# Altium PCB PCB1.PcbDoc
Units mil, origin at the board's own origin, x right, y up, seen from the top; angles counter-clockwise.
Board outline 5500 x 4000 mil, 2 copper layers (Top Layer, Bottom Layer); 61 components, 63 nets, 287 pads, 71 vias.
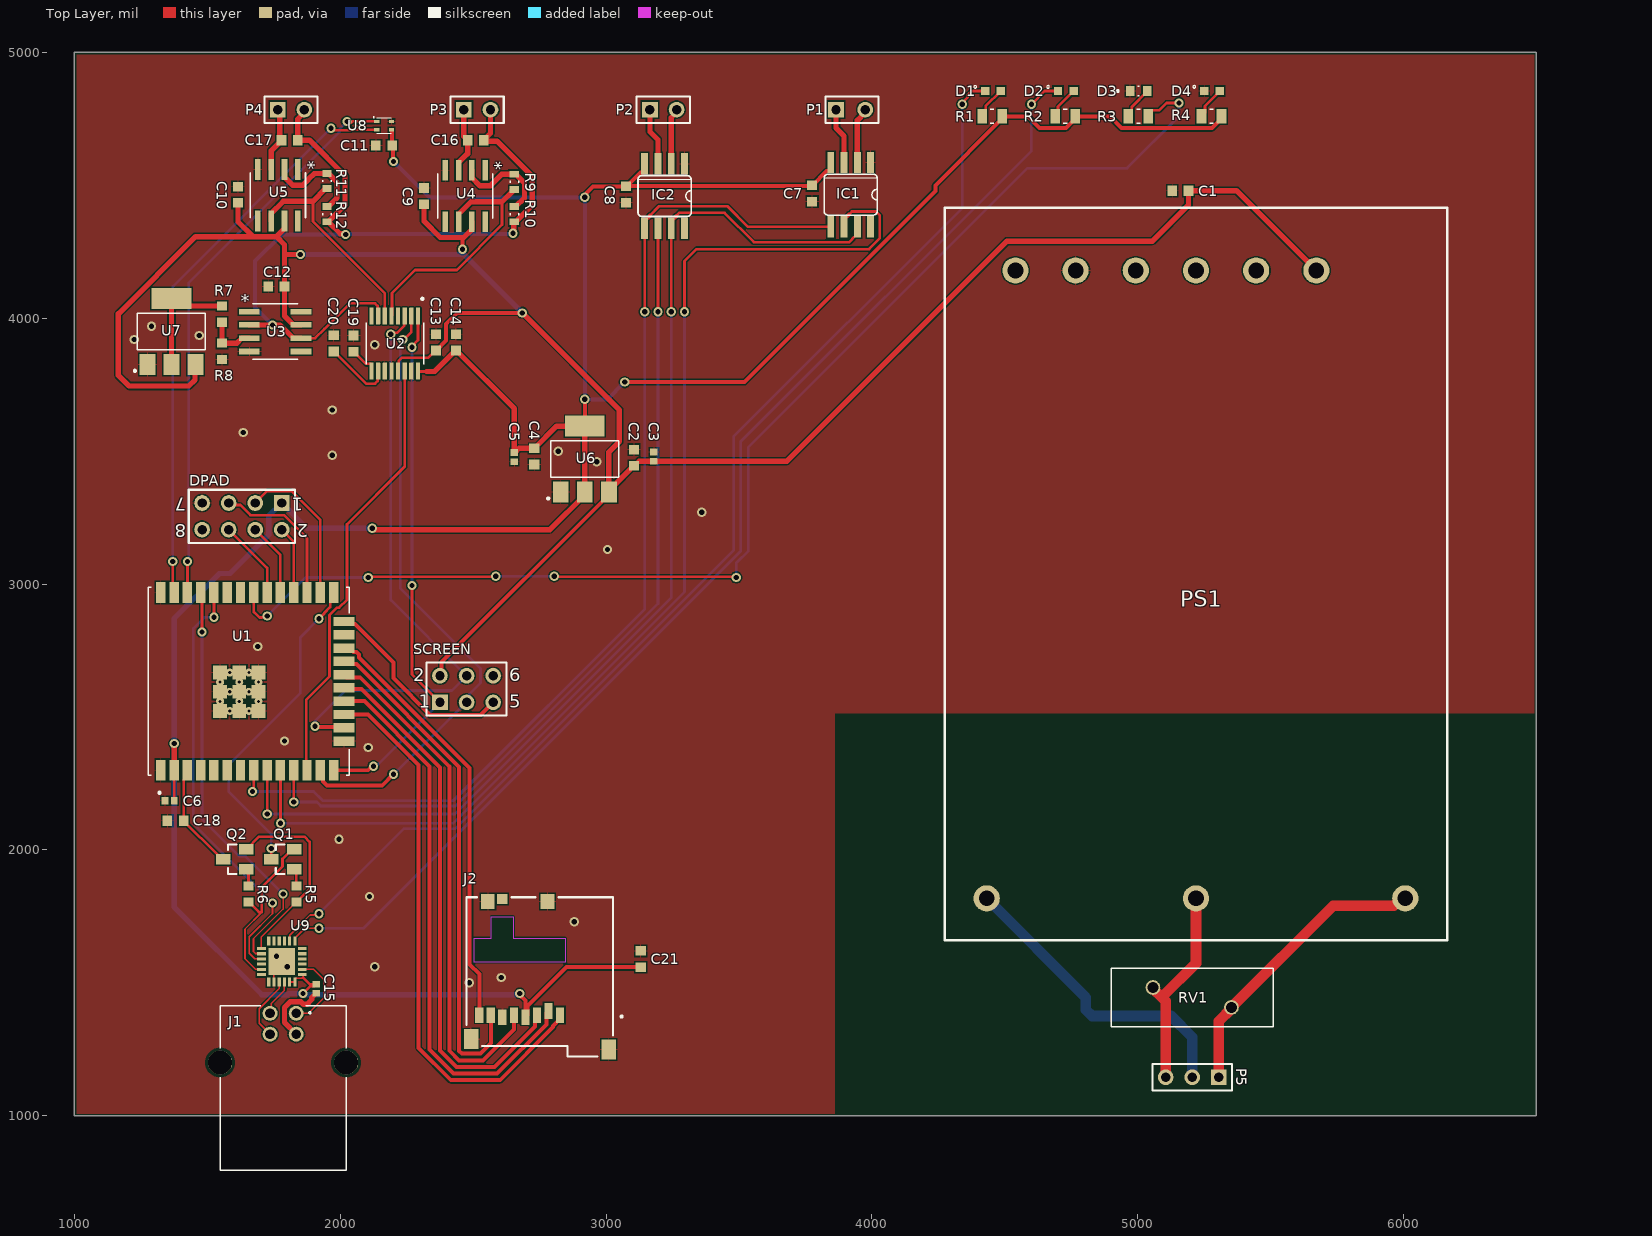
[diagram p0: Top Layer view]
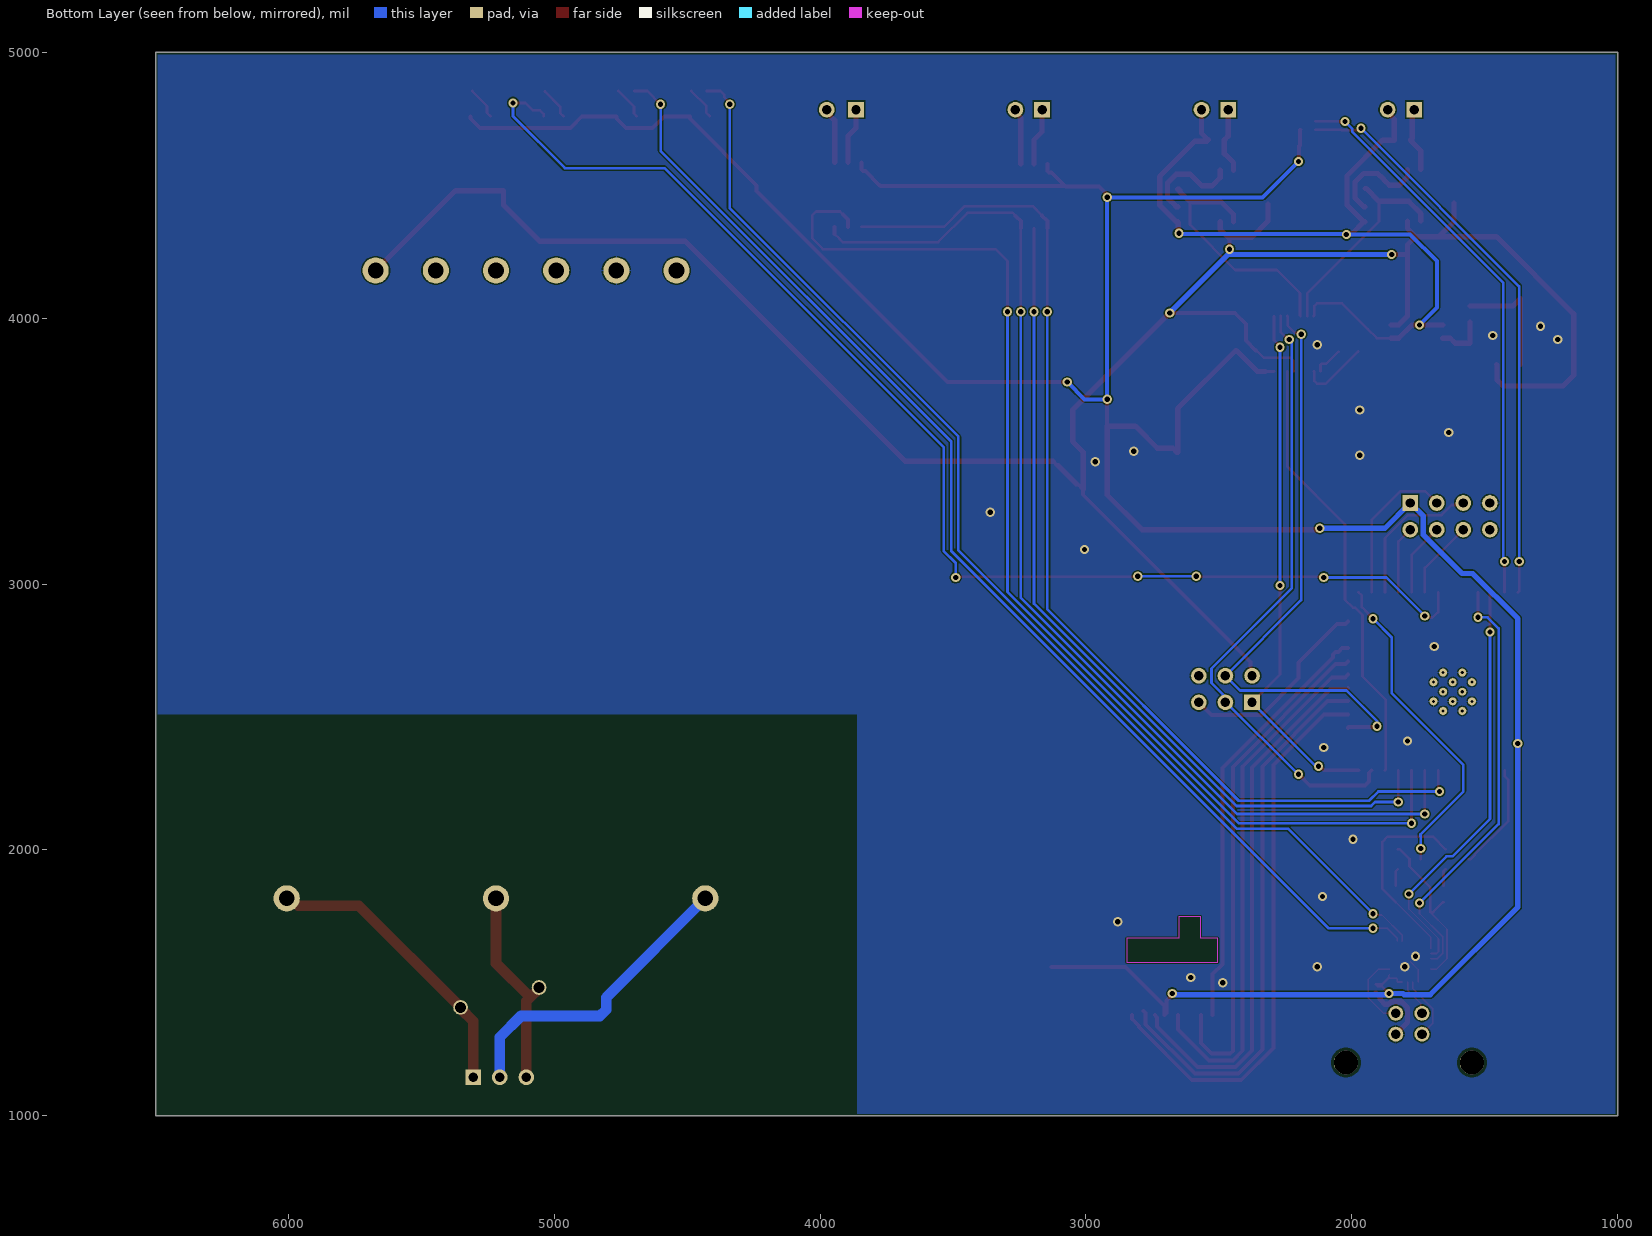
[diagram p1: Bottom Layer view, seen from below]

## Layer stack, top to bottom
Top Solder: solder mask 0.4, Solder Resist, Dk 3.5
Top Layer: signal copper 1.4
Dielectric 1: dielectric 12.6, FR-4, Dk 4.8
Bottom Layer: signal copper 1.4
Bottom Solder: solder mask 0.4, Solder Resist, Dk 3.5

## Board outline
1000,1000 6500,1000 6500,5000 1000,5000

## Design rules (kind name [scope] priority, off if disabled: settings)
BoardOutlineClearance [All] p1: gap=7.87 ignorepadtopadclearanceinfootprint=FALSE
Clearance [All] p1: gap=5 ignorepadtopadclearanceinfootprint=FALSE except(9.84: Arc-Hole Track-Hole SMDPad-Hole THPad-Hole Via-Hole Fill-Hole Poly-Hole Region-Hole Text-Hole)
ComponentClearance [All] p1: gap=5 collisioncheckmode=3 verticalgap=5 showdistances=TRUE
DiffPairsRouting [All] p1: maxlimit=10 minlimit=5 mostfreqgap=5 toplayer_minwidth=5 toplayer_maxwidth=1000 toplayer_prefwidth=5 bottomlayer_minwidth=5 bottomlayer_maxwidth=1000 bottomlayer_prefwidth=5 maxuncoupledlength=500
Height [All] p1: minheight=0 maxheight=71497.94 prefheight=500
HoleSize [All] p1: absolutevalues=TRUE maxlimit=248.03 minlimit=11.81 maxpercent=80.000 minpercent=20.000
HoleToHoleClearance [All] p1: gap=9.84 allowstackedmicrovias=FALSE
MinimumAnnularRing [All] p1: minimumring=3
MinimumSolderMaskSliver [All] p1: minsoldermaskwidth=0
PlaneClearance [All] p1: clearance=5
PlaneConnect PlaneConnectPowerPads [InPadClass('PowerPads')] p1: planeconnectstyle=Direct reliefexpansion=20 reliefentries=4 reliefconductorwidth=10 reliefairgap=10
PlaneConnect [All] p2: pad.planeconnectstyle=Relief pad.reliefexpansion=11.81 pad.reliefentries=4 pad.reliefconductorwidth=5 pad.reliefairgap=5 via.planeconnectstyle=Direct via.reliefexpansion=11.81 via.reliefentries=4 via.reliefconductorwidth=5 via.reliefairgap=5
PolygonConnect PolygonConnectPowerPads [All vs (InPadClass('PowerPads'))] p1: connectstyle=Direct reliefconductorwidth=10 reliefentries=4 polygonreliefangle="90 Angle" airgapwidth=10
PolygonConnect [All] p2: thpad.connectstyle=Relief thpad.reliefconductorwidth=5 thpad.reliefentries=4 thpad.polygonreliefangle="90 Angle" thpad.airgapwidth=5 smdpad.connectstyle=Relief smdpad.reliefconductorwidth=5 smdpad.reliefentries=4 smdpad.polygonreliefangle="90 Angle" smdpad.airgapwidth=5 via.connectstyle=Direct via.reliefconductorwidth=5 via.reliefentries=4 via.polygonreliefangle="90 Angle" via.airgapwidth=5
RoutingVias [All] p1: holewidth=11.81 width=23.62 viastyle="Through Hole" minholewidth=11.81 minwidth=23.62 maxholewidth=23.62 maxwidth=259.84
SilkToSilkClearance [All] p1: silktosilkclearance=0
SilkToSolderMaskClearance [IsPad] p1: minsilkscreentomaskgap=5 clearancetoexposedcopper=TRUE
SolderMaskExpansion [All] p1: expansion=2.95 istentingtop=FALSE
Width [All] p1: maxlimit=1000 minlimit=5 preferedwidth=5 minimp=50.000000 maximp=50.000000 favimp=50.000000
20 further rules are at their usual default settings.

## Components (designator, comment, footprint, x,y, rotation, side; value= is the part's Value field where it differs from the comment)
C1 "06035C104K4T4A" CAPC1608X90N 5160.51,4480 r180 top
C2 "06035C104K4T4A" CAPC1608X90N 3105,3475.51 r90 top
C3 "GRM155R60J106ME05J" CAPC1005X70N 3180,3480 r90 top
C4 "06035C104K4T4A" CAPC1608X90N 2730,3480.51 r270 top
C5 "GRM155R60J106ME05J" CAPC1005X70N 2655,3477.72 r270 top
C6 "GRM155R60J106ME05J" CAPC1005X70N 1357.72,2185 r180 top
C7 "06035C104K4T4A" CAPC1608X90N 3775,4469.49 r270 top
C8 "06035C104K4T4A" CAPC1608X90N 3075,4465.51 r270 top
C9 "06035C104K4T4A" CAPC1608X90N 2315,4459.49 r90 top
C10 "06035C104K4T4A" CAPC1608X90N 1615,4464.49 r90 top
C11 "06035C104K4T4A" CAPC1608X90N 2164.49,4650 r180 top
C12 "06035C104K4T4A" CAPC1608X90N 1759.49,4120 r180 top
C13 "06035C104K4T4A" CAPC1608X90N 2360,3909.49 r90 top
C14 "06035C104K4T4A" CAPC1608X90N 2435,3909.49 r90 top
C15 "GRM155R60J106ME05J" CAPC1005X70N 1910,1477.72 r270 top
C16 "06035C104K4T4A" CAPC1608X90N 2509.49,4670 r0 top
C17 "06035C104K4T4A" CAPC1608X90N 1809.49,4670 r0 top
C18 "0603ZD105KAT2A" CAPC1608X90N 1380,2110 r180 top
C19 "0603ZD105KAT2A" CAPC1608X90N 2050,3904.49 r90 top
C20 "06035C104K4T4A" CAPC1608X90N 1975,3905.51 r90 top
C21 "06035C104K4T4A" CAPC1608X90N 3130,1589.49 r90 top
D1 "LTST-C190KFKT" LEDM1608X80 4455.47,4855 r0 top
D2 "LTST-C190KFKT" LEDM1608X80 4729.53,4855 r0 top
D3 "LTST-C190KRKT" LEDC1608X35N 5003.11,4855 r0 top
D4 "LTST-C190GKT" LEDM1608X80 5279.53,4855 r0 top
DPAD "Header 4X2" HDR2X4 1780,3305 r180 top
IC1 "MAX6675" SO08 3920,4465 r180 top
IC2 "MAX6675" SO08 3220,4460 r180 top
J1 "292304-1" TE_292304-1 1785,1200 r0 top
J2 "MEM2051-00-195-00-A_REVD1" GCT_MEM2051-00-195-00-A_REVD1 2750.16,1522.68 r0 top
P1 "Header 2" HDR1X2#1 3875,4785 r0 top
P2 "Header 2" HDR1X2#2 3165,4785 r0 top
P3 "Header 2" HDR1X2#2 2465,4785 r0 top
P4 "Header 2" HDR1X2#2 1765,4785 r0 top
P5 "Header 3" HDR1X3 5305,1145 r180 top
PS1 "AME25-5SVZ" CONV_KWS5A-5 6164.02,1660.32 r90 top
Q1 "MMBT2222*" SOT23-BEC 1783.31,1965 r90 top
Q2 "MMBT2222*" SOT23-BEC 1603.31,1965 r90 top
R1 "AC0805JR-07120RL" RESC2012X60N 4452.4,4760 r0 top
R2 "AC0805JR-07120RL" RESC2012X60N 4727.4,4760 r0 top
R3 "AC0805JR-07120RL" RESC2012X60N 5002.6,4760 r0 top
R4 "AC0805JR-07120RL" RESC2012X60N 5277.4,4760 r0 top
R5 "CR0603-FX-1002ELF" RESC1608X55N 1835,1834.29 r270 top
R6 "CR0603-FX-1002ELF" RESC1608X55N 1655,1834.29 r270 top
R7 "CR0603-FX-2202ELF" RESC1608X55N 1555,4015.71 r270 top
R8 "CR0603-FX-1002ELF" RESC1608X55N 1555,3875.71 r90 top
R9 "ERA3AEB334V" RES_ERA3AEB334V 2655,4513.54 r270 top
R10 "ERA3AEB561V" RES_ERA3AEB561V 2655,4391.46 r90 top
R11 "ERA3AEB334V" RES_ERA3AEB334V 1950,4516.46 r270 top
R12 "ERA3AEB561V" RES_ERA3AEB561V 1950,4391.46 r90 top
RV1 "B72214S2301K101" VAR_B72214S2301K101 5205,1445 r0 top
SCREEN "Header 3X2" HDR2X3 2375,2555 r0 top
U1 "ESP32-WROOM-32U" XCVR_ESP32-WROOM-32U 1655.83,2634.37 r90 top
U2 "MAX1167BCEE" SOP63P602X175-16N 2205,3905 r270 top
U3 "LTC1049CS8TR" SO-8_S 1755,3950 r0 top
U4 "LTC1049CS8TR" SO-8_S 2470,4460 r270 top
U5 "LTC1049CS8TR" SO-8_S 1765,4463 r270 top
U6 "NCP1117LPST33T3G" SOT230P700X175-4N 2920,3470 r90 top
U7 "NCP1117LPST33T3G" SOT230P700X175-4N 1365,3950 r90 top
U8 "STS4X" STS4X 2165,4725 r0 top
U9 "CP2102N-A02-GQFN24" QFN50P400X400X80-25N 1780,1580 r90 top

## Footprints (in the part's own frame and the unit in brackets; to place one, negate y for a bottom-side part, rotate by r counter-clockwise, add the part's x,y. Pads: shape width x height; smd on the part's side, far side on the other; paste and mask are expansions set on the pad)
CAPC1005X70N [mm]
  rect 0.64x0.72 smd: 1(-0.439,0) 2(0.439,0)
CAPC1608X90N [mm]
  rect 0.92x0.98 smd: 1(-0.775,0) 2(0.775,0)
CONV_KWS5A-5 [mm]
  round 2.5 hole 1.5: 1(4,44) 2(4,24) 3(4,4) 4(64,41.25) 5(64,35.5) 6(64,29.75) 7(64,24) 8(64,18.25) 9(64,12.5)
  silkscreen extent 0,0 70,48
GCT_MEM2051-00-195-00-A_REVD1 [mm]
  rect 1x0.95 smd: CD(-3.56,7.425)
  rect 0.8x1.5 smd: P1(1.94,-3.66) P2(0.84,-3.26) P3(-0.26,-3.66) P4(-1.36,-3.86) P5(-2.46,-3.66) P6(-3.56,-3.86) P7(-4.66,-3.66) P8(-5.76,-3.66)
  rect 1.3x1.4 smd: S1(-4.95,7.2) S2(0.75,7.2)
  rect 1.4x1.9 smd: S3(6.6,-6.95) S4(-6.55,-5.95)
  Keep-Out Layer region: -2.51,3.67 2.45,3.67 2.45,1.37 -6.25,1.37 -6.25,3.67 -4.61,3.67 -4.61,5.74 -2.51,5.74
  silkscreen extent -7,-7.6 7.93,7.6
HDR1X2#1 [mm] "Connector; Header; 2 Position"
  rect 1.5x1.5 hole 0.9: 1(-0.254,0)
  round 1.5 hole 0.9: 2(2.54,0)
  silkscreen extent -1.27,-1.27 3.81,1.27
HDR1X2#2 [mm] "Connector; Header; 2 Position"
  rect 1.5x1.5 hole 0.9: 1(0,0)
  round 1.5 hole 0.9: 2(2.54,0)
  silkscreen extent -1.27,-1.27 3.81,1.27
HDR1X3 [mm] "Connector; Header; 3 Position"
  rect 1.5x1.5 hole 0.9: 1(0,0)
  round 1.5 hole 0.9: 2(2.54,0) 3(5.08,0)
  silkscreen extent -1.27,-1.27 6.35,1.27
HDR2X3 [mm] "Connector; Header; 3x2 Position"
  rect 1.5x1.5 hole 0.9: 1(0,0)
  round 1.5 hole 0.9: 2(0,2.54) 3(2.54,0) 4(2.54,2.54) 5(5.08,0) 6(5.08,2.54)
  silkscreen extent -1.27,-1.27 6.35,3.81
HDR2X4 [mm] "Connector; Header; 4x2 Position"
  rect 1.5x1.5 hole 0.9: 1(0,0)
  round 1.5 hole 0.9: 2(0,2.54) 3(2.54,0) 4(2.54,2.54) 5(5.08,0) 6(5.08,2.54) 7(7.62,0) 8(7.62,2.54)
  silkscreen extent -1.27,-1.27 8.89,3.81
LEDC1608X35N [mm]
  rect 0.81x0.93 smd: A(0.81,0) C(-0.81,0)
  silkscreen extent -2.1,-0.45 0.08,0.45
LEDM1608X80 [mm]
  rect 0.8x0.8 smd: A(0.75,0) C(-0.75,0)
  silkscreen extent -1.83,0.27 -1.57,0.53, body extent -0.4,-0.8 0.4,0.8, height 0.8
QFN50P400X400X80-25N [mm]
  rect 0.85x0.3 smd: 1(-1.95,1.25) 2(-1.95,0.75) 3(-1.95,0.25) 4(-1.95,-0.25) 5(-1.95,-0.75) 6(-1.95,-1.25) 13(1.95,-1.25) 14(1.95,-0.75) 15(1.95,-0.25) 16(1.95,0.25) 17(1.95,0.75) 18(1.95,1.25)
  rect 0.3x0.85 smd: 7(-1.25,-1.95) 8(-0.75,-1.95) 9(-0.25,-1.95) 10(0.25,-1.95) 11(0.75,-1.95) 12(1.25,-1.95) 19(1.25,1.95) 20(0.75,1.95) 21(0.25,1.95) 22(-0.25,1.95) 23(-0.75,1.95) 24(-1.25,1.95)
  rect 2.55x2.55 smd: 25(0,0)
RES_ERA3AEB334V [mm]
  rect 0.65x0.9 smd: 1(-0.725,0) 2(0.725,0)
  silkscreen extent -0.08,-0.4 0.08,0.4
RES_ERA3AEB561V [mm]
  rect 0.65x0.9 smd: 1(-0.725,0) 2(0.725,0)
  silkscreen extent -0.08,-0.4 0.08,0.4
RESC1608X55N [mm]
  rect 0.87x0.93 smd: 1(-0.78,0) 2(0.78,0)
RESC2012X60N [mm]
  rect 0.92x1.38 smd: 1(-0.955,0) 2(0.955,0)
  silkscreen extent -0.17,-0.68 0.17,0.68
SO08 [mil]
  rect 26x80 smd: 1(-75,-121) 2(-25,-121) 3(25,-121) 4(75,-121) 5(75,121) 6(25,121) 7(-25,121) 8(-75,121)
  silkscreen extent -100,-77 100,77
SO-8_S [mil]
  rect 78x21 smd: 1(-97,75) 2(-97,25) 3(-97,-25) 4(-97,-75) 5(97,-75) 6(97,-25) 7(97,25) 8(97,75)
  silkscreen extent -84,-104 84,104
SOP63P602X175-16N [mm]
  rrect25% 1.64x0.41 smd: 1(-2.635,2.222) 2(-2.635,1.587) 3(-2.635,0.952) 4(-2.635,0.317) 5(-2.635,-0.318) 6(-2.635,-0.953) 7(-2.635,-1.588) 8(-2.635,-2.223) 9(2.635,-2.222) 10(2.635,-1.587) 11(2.635,-0.952) 12(2.635,-0.317) 13(2.635,0.318) 14(2.635,0.953) 15(2.635,1.588) 16(2.635,2.223)
  silkscreen extent -4.37,-2.75 2,2.75
SOT23-BEC [mm]
  rect 1x1.4 smd: B(-0.95,-1.1) C(0,1.1) E(0.95,-1.1)
  silkscreen extent -1.42,-0.15 1.42,0.66
SOT230P700X175-4N [mm]
  rect 2x1.5 smd: 1(-3.15,2.3) 2(-3.15,0) 3(-3.15,-2.3)
  rect 2x3.8 smd: 4(3.15,0)
  silkscreen extent -3.85,-3.25 1.75,3.6
STS4X [mm]
  rect 0.5x0.3 smd: 1(-0.7,0.4) 2(-0.7,-0.4) 3(0.7,-0.4) 4(0.7,0.4)
  silkscreen extent -1.05,-0.75 0.7,0.85, body extent -0.75,-0.75 0.75,0.75, height 0.55
TE_292304-1 [mm]
  round 1.428 hole 0.92: 1(1.25,4.71) 2(-1.25,4.71) 3(-1.25,2.71) 4(1.25,2.71)
  round 2.3 hole 2.3 unplated: ""(-6.02,0) ""(6.02,0)
  silkscreen extent -6.01,-10.28 6.02,5.43
VAR_B72214S2301K101 [mm]
  round 1.4 hole 1.05: 1(-3.75,0.95) 2(3.75,-0.95)
  silkscreen extent -7.75,-2.8 7.75,2.8
XCVR_ESP32-WROOM-32U [mm]
  rect 2x0.9 smd: 1(-8.5,8.41) 2(-8.5,7.14) 3(-8.5,5.87) 4(-8.5,4.6) 5(-8.5,3.33) 6(-8.5,2.06) 7(-8.5,0.79) 8(-8.5,-0.48) 9(-8.5,-1.75) 10(-8.5,-3.02) 11(-8.5,-4.29) 12(-8.5,-5.56) 13(-8.5,-6.83) 14(-8.5,-8.1) 25(8.5,-8.1) 26(8.5,-6.83) 27(8.5,-5.56) 28(8.5,-4.29) 29(8.5,-3.02) 30(8.5,-1.75) 31(8.5,-0.48) 32(8.5,0.79) 33(8.5,2.06) 34(8.5,3.33) 35(8.5,4.6) 36(8.5,5.87) 37(8.5,7.14) 38(8.5,8.41)
  rect 0.9x2 smd: 15(-5.715,-9.1) 16(-4.445,-9.1) 17(-3.175,-9.1) 18(-1.905,-9.1) 19(-0.635,-9.1) 20(0.635,-9.1) 21(1.905,-9.1) 22(3.175,-9.1) 23(4.445,-9.1) 24(5.715,-9.1)
  rect 1.33x1.33 smd: G.1(0.835,2.745) G.2(-1,2.745) G.4(-2.835,2.745) G.5(0.835,0.91) G.6(-1,0.91) G.7(-2.835,0.91) G.8(0.835,-0.925) G.9(-1,-0.925) G.10(-2.835,-0.925)
  round 0.762 hole 0.305: G.11(-0.083,2.745) G.12(-1.917,2.745) G.13(0.835,1.827) G.14(-1,1.827) G.15(-2.835,1.827) G.16(-0.083,0.91) G.17(-1.917,0.91) G.18(0.835,-0.007) G.19(-1,-0.007) G.20(-2.835,-0.007) G.21(-0.083,-0.925) G.22(-1.917,-0.925)
  silkscreen extent -10.75,-9.6 9,9.6, body extent -9,-9.6 9,9.6, height 3.3

## Part data
C1 C2 C4 C7 C8 C9 C10 C11 C12 C13 C14 C16 C17 C20 C21: "0.1ÂµF Â±10% 50V Ceramic Capacitor X7R 0603 _1608 Metric_", Package="1608 AVX", Digi-Key_Part_Number=478-9903-1-ND, Digi-Key_Purchase_URL=https://www.digikey.com/product-detail/en/avx-corporation/06035C104K4T4A/478-9903-1-ND/6002664?utm_source=snapeda&utm_medium=aggregator&utm_campaign=symbol, MF=AVX, MP=06035C104K4T4A, SnapEDA_Link=https://www.snapeda.com/parts/06035C104K4T4A/AVX%20/%20Kyocera/view-part/1760822/?ref=snap
C3 C5 C6 C15 J2 R9 R10 R11 R12 RV1 U2 U3 U4 U5: Package=None, Price=None
  C3 C5 C6 C15: Availability=Unavailable, MP=GRM155R60J106ME05J
  J2: Availability=Unavailable, MP=MEM2051-00-195-00-A_REVD1
  R9 R11: Availability=Unavailable, MP=ERA3AEB334V
  R10 R12: Availability=Unavailable, MP=ERA3AEB561V
  RV1: Availability="In Stock", Check_prices=https://www.snapeda.com/parts/B72214S2301K101/TM+Electronics/view-part/?ref=eda, MF="TDK ELECTRONICS", MP=B72214S2301K101, Purchase-URL=https://pricing.snapeda.com/search/part/B72214S2301K101/?ref=eda, SnapEDA_Link=https://www.snapeda.com/parts/B72214S2301K101/TM+Electronics/view-part/?ref=snap
  U2: Availability=Unavailable, MP=MAX1167BCEE
  U3 U4 U5: Availability=Unavailable, MP=LTC1049CS8TR
C18 C19: "Cap Ceramic 1uF 10V X5R 10% SMD 0603 85Â°C Paper T/R", Package=None, Availability=Unavailable, MP=0603ZD105KAT2A, Price=None
D1 D2: "Orange 605nm LED Indication - Discrete 2V 0603 (1608 Metric)", Package="0603 Lite-On", Check_prices=https://www.snapeda.com/parts/LTST-C190KFKT/Lite-On%20Inc./view-part/46927/?ref=eda, Digi-Key_Part_Number=160-1434-1-ND, MF="Lite-On Inc.", MP=LTST-C190KFKT, Purchase-URL=https://pricing.snapeda.com/search/part/LTST-C190KFKT/?ref=eda, SnapEDA_Link=https://www.snapeda.com/parts/LTST-C190KFKT/Lite-On%20Inc./view-part/46927/?ref=snap
D3: "Red 631nm LED Indication - Discrete 2V 0603 _1608 Metric_", Package="0603 Lite-On", Digi-Key_Part_Number=160-1436-1-ND, Digi-Key_Purchase_URL=https://www.digikey.com/product-detail/en/lite-on-inc/LTST-C190KRKT/160-1436-1-ND/386816?utm_source=snapeda&utm_medium=aggregator&utm_campaign=symbol, MF="Lite-On Inc.", MP=LTST-C190KRKT, SnapEDA_Link=https://www.snapeda.com/parts/LTST-C190KRKT/Lite-On%20Inc./view-part/49359/?ref=snap
D4: "Green 569nm LED Indication - Discrete 2.1V 0603 (1608 Metric)", Package="0603 Lite-On", Digi-Key_Part_Number=160-1183-1-ND, DigiKey-Purchase-URL=https://snapeda.com/shop?store=DigiKey&id=46935, MF="Lite-On Inc.", MP=LTST-C190GKT, SnapEDA_Link=https://www.snapeda.com/parts/LTST-C190GKT/Lite-On%20Inc./view-part/46935/?ref=snap
DPAD: "Header, 4-Pin, Dual row", LatestRevisionDate=17-Jul-2002, LatestRevisionNote="Re-released for DXP Platform.", Publisher="Altium Limited"
IC1 IC2: "IC THERMOCOUP TO DGTL 8-SOIC", Package="SOIC-8 Maxim Integrated", Availability=Unavailable, MF="Maxim Integrated", MP=MAX6675, Price=None, SnapEDA_Link=https://www.snapeda.com/parts/MAX6675/Maxim%20Integrated/view-part/558569/?ref=snap
J1: "CONN USB RECEPT R/A TYPE B 4POS", Package=None, Availability=Unavailable, MP=292304-1, Price=None
P1 P2 P3 P4: "Header, 2-Pin", LatestRevisionDate=17-Jul-2002, LatestRevisionNote="Re-released for DXP Platform.", Publisher="Altium Limited"
P5: "Header, 3-Pin", LatestRevisionDate=17-Jul-2002, LatestRevisionNote="Re-released for DXP Platform.", Publisher="Altium Limited"
PS1: "Enclosed AC DC Converters", Package="DIP-4 TDK-Lambda", Availability="In Stock", Check_prices=https://www.snapeda.com/parts/KWS5A-5/TDK-Lambda+Americas+Inc/view-part/?ref=eda, MF="TDK-Lambda Americas Inc", MP=KWS5A-5, Price=None, Purchase-URL=https://pricing.snapeda.com/search/part/KWS5A-5/?ref=eda, SnapEDA_Link=https://www.snapeda.com/parts/KWS5A-5/TDK-Lambda+Americas+Inc/view-part/?ref=snap
Q1 Q2: "Bipolar _BJT_ Transistor NPN 30V 600mA 250MHz 350mW Surface Mount SOT-23-3", Package="SOT-23-3 Fairchild Semiconductor", Availability=Unavailable, MF="ON Semiconductor", MP=MMBT2222, Price=None, SnapEDA_Link=https://www.snapeda.com/parts/MMBT2222/ON%20Semiconductor/view-part/214298/?ref=snap
R1 R2 R3 R4: "AC0805 120R 5% 0,125W AUTOMO", Package=None, Availability=Unavailable, MP=AC0805JR-07120RL, Price=None
R5 R6 R8: "10 kOhms Â±1% 0.1W, 1/10W Chip Resistor 0603 _1608 Metric_ Moisture Resistant Thick Film", Package="1608 Rohm Semiconductor", Availability=Unavailable, MF=Bourns, MP=CR0603-FX-1002ELF, Price=None, SnapEDA_Link=https://www.snapeda.com/parts/CR0603-FX-1002ELF/Bourns/view-part/52302/?ref=snap
R7: "Res Thick Film 0603 22K Ohm 1% 1/10W Â±100ppm/Â°C Molded SMD SMD Paper Tape on Plastic Reel", Package=None, Availability=Unavailable, MP=CR0603-FX-2202ELF, Price=None
SCREEN: "Header, 3-Pin, Dual row", LatestRevisionDate=17-Jul-2002, LatestRevisionNote="Re-released for DXP Platform.", Publisher="Altium Limited"
U1: "Bluetooth, WiFi 802.11b/g/n, Bluetooth v4.2 +EDR, Class 1, 2 and 3 Transceiver Module 2.4GHz ~ 2.5GHz Antenna Not Included, U.FL Surface Mount", Package="Module Espressif Systems", Availability="In Stock", Check_prices=https://www.snapeda.com/parts/ESP32-WROOM-32U/Espressif+Systems/view-part/?ref=eda, MF="Espressif Systems", MP=ESP32-WROOM-32U, Price=None, Purchase-URL=https://pricing.snapeda.com/search/part/ESP32-WROOM-32U/?ref=eda, SnapEDA_Link=https://www.snapeda.com/parts/ESP32-WROOM-32U/Espressif+Systems/view-part/?ref=snap
U6 U7: "Linear Voltage Regulator IC 1 Output 1A SOT-223", Package="SOT-223 ON Semiconductor", Availability=Unavailable, MF="ON Semiconductor", MP=NCP1117LPST33T3G, Price=None, SnapEDA_Link=https://www.snapeda.com/parts/NCP1117LPST33T3G/ON%20Semiconductor/view-part/421194/?ref=snap
U8: "Digital Temperature Sensor, Â±0.2 Â°C, Ultra-Low-Power, I2C fast mode plus", Package="DFN-4 Sensirion", Availability="In Stock", Check_prices=https://www.snapeda.com/parts/STS40-CD1B-R3/Sensirion/view-part/?ref=eda, MF=Sensirion, MP=STS40-CD1B-R3, Price=None, Purchase-URL=https://pricing.snapeda.com/search/part/STS40-CD1B-R3/?ref=eda, SnapEDA_Link=https://www.snapeda.com/parts/STS40-CD1B-R3/Sensirion/view-part/?ref=snap
U9: "USB Bridge, USB to UART USB 2.0 UART Interface 24-QFN (4x4)", Package="WFQFN-24 Silicon Labs", Availability=Warning, MF="Silicon Labs", Mouser-Purchase-URL=https://snapeda.com/shop?store=Mouser&id=3656696, MP=CP2102N-A02-GQFN24, Price=None, SnapEDA_Link=https://www.snapeda.com/parts/CP2102N-A02-GQFN24/Silicon%20Labs/view-part/3656696/?ref=snap

## Via types
v1: diameter 35, hole 20, Top Layer to Bottom Layer, 71 vias

## Nets (pads, with @x,y where several pads share a name; then routed paths per layer and width w, separated by ;. In a path a pad name is that pad's centre, name@x,y a point inside that pad or via, vN(x,y) a via of type N, cw(c..) or ccw(c..) an arc to the next point about the centre after c; other vN are vias at no path point)
3.3: C4.1 C5.1 C6.1 C7.1 C8.1 C11.1 C14.1 C15.1 C21.1 DPAD.1 IC1.4 IC2.4 J2.P4 R1.2 R2.2 R4.2 U1.2 U2.16 U6.2 U6.4 U8.3 U9.5 U9.6 U9.7 | length 12453.4
  Top Layer w6: U9.5 U9.6 1829.21,1513.9 1832.12,1516.8 1856.8,1516.8 1860,1520 1860,1527.88 1857.09,1530.79 U9.7
  Top Layer w10: C6.1 U1.2@1375,2299.45 ; 1860,1520 1885,1495 C15.1 1902.4,1487.4 1887.4,1487.4 v1(1860.05,1460.05) ; U2.16 2293.76,3800 2325,3800
  Top Layer w15: U8.3 2193.78,4708.03 2193.78,4651.22 C11.1 2197.5,4647.5 2197.5,4592.5 v1(2200,4590) ; v1(2675,1460) 2675,1454.59 2696.61,1432.97 2696.61,1387.2 2704.86,1378.96 2704.86,1413.55 2850.29,1558.98 C21.1 ; U6.4 v1(2920,3695) ; v1(2920,4455) 2920,4465 2951.02,4496.02 C8.1 3076.18,4496.02 C8.1@3078.17,4498.01 ; v1(3070,3760) 3520.57,3760 4238.73,4478.16 4238.73,4499.67 4490,4750.94 R1.2 4585.55,4760 4630.22,4715.33 4729.39,4715.33 4765,4750.94 R2.2 4894.98,4760 4939.64,4715.33 5279.39,4715.33 5315,4750.94 R4.2 ; IC2.4 3145,4554 3139.5,4548.5 3128.66,4548.5 C8.1@3078.17,4498.01 ; IC1.4 3845,4559 3839.5,4553.5 3829.68,4553.5 3776.18,4500 C7.1 3773.01,4498.01 C8.1@3078.17,4498.01
  Top Layer w20: U1.2@1375,2299.45 1374.86,2299.59 1374.86,2399.86 v1(1375,2400) ; v1(2120,3210) 2125,3205 2788.86,3205 2920,3336.14 U6.2 U6.4 2814.17,3594.02 2731.18,3511.02 C4.1 2672.6,3511.02 2656.57,3495 C5.1 2655,3660.16 2436.18,3878.98 C14.1 2433.82,3878.98 2354.84,3800 2325,3800
  Bottom Layer w15: v1(2200,4590) 2335,4455 v1(2920,4455) v1(2920,3695) 3005,3695 v1(3070,3760)
  Bottom Layer w20: v1@1855,1455 2660,1455 2665,1460 v1(2675,1460) ; v1(1860.05,1460.05) 1807.6,1460.05 1802.55,1455 1705,1455 1375,1785 v1(1375,2400) 1375,2870 1545,3040 1585.04,3040 1730.47,3185.43 1730.47,3255.47 DPAD.1 1875,3210 v1(2120,3210)
+5: C1.1 C2.1 C3.1 C9.1 C10.1 C12.1 C13.1 PS1.9 SCREEN.2 U2.13 U3.7 U4.7 U5.7 U6.3 U7.3 | length 8967.8
  Top Layer w10: U2.13 2219.43,3803.19 2219.43,3838.57 2232.58,3851.72 2331.57,3851.72 2358.82,3878.98 C13.1
  Top Layer w15: 1790,4245 1795,4240 ; C13.1 2361.18,3878.98 2398.21,3916 2398.21,3978.21 2440,4020 v1(2685,4020) ; SCREEN.2 2381.44,2661.44 2381.44,2707.03 3010.55,3336.14 U6.3 3010.55,3355.83 3032.58,3377.85 U6.3@3036.67,3377.85 ; v1(2460,4260) 2460,4299.5 2464.5,4304 ; C2.1@3103.82,3445 C2.1 3106.18,3445 C2.1@3123.9,3462.72 ; C1.1@5191.02,4478.82 C1.1
  Top Layer w20: U7.3 1453.33,3823.76 1453.33,3768.33 1430,3745 1205,3745 1165,3785 1165,4016.47 1455.53,4307 1671.22,4307 ; C10.1 1615,4363.22 1671.22,4307 ; U5.7 1790,4337.5 1759.5,4307 ; 1795,4240 v1(1850,4240) ; U3.7 1823.5,3975 1790,4008.5 C12.1 1790,4245 1790,4276.5 1759.5,4307 ; C9.1 2315,4365.22 2376.22,4304 2464.5,4304 2495,4334.5 U4.7 ; v1(2685,4020) 3050,3655 3050,3536.15 3010.55,3496.7 U6.3@3010.55,3355.83 ; U6.3@3036.67,3377.85 C2.1@3103.82,3445 ; C2.1@3123.9,3462.72 C3.1 3680.8,3462.72 4508.08,4290 5055,4290 5191.02,4426.02 C1.1 5371.89,4480 PS1.9 ; 1671.22,4307 1759.5,4307
  Bottom Layer w20: v1(1850,4240) 2465,4240 v1(2685,4020)
ADCEOC: U2.4
Center: DPAD.3 U1.26 | length 579.8
  Top Layer w10: DPAD.3 1724.53,3349.53 1815.74,3349.53 1924.72,3240.54 U1.26
CSADC: U1.12 U2.14 | length 1660.2
  Top Layer w10: U1.12 1872.5,2301.95 1872.5,2565.08 1959.72,2652.31 1959.72,2883.3 1987.87,2911.44 1995.45,2911.44 2025,2940.99 2025,3225 2242.5,3442.5 U2.14
CSLCD: SCREEN.5 U1.24 | length 760.6
  Top Layer w15: U1.24 2024.31,2849.15 2056.15,2849.15 2199.47,2705.83 2199.47,2646.73 2338.22,2507.97 2527.97,2507.97 SCREEN.5
Down: DPAD.2 U1.28 | length 254.5
  Top Layer w10: DPAD.2 1824.72,3160.28 U1.28
DTR: Q1.E R6.2 U9.23 | length 637
  Top Layer w6: U9.23 1702.45,1551.25 1681.11,1551.25 1641.5,1590.87 1641.5,1702.22 1705,1765.73
  Top Layer w10: R6.2 1656.18,1803.58 1694.04,1765.73 1705,1765.73 1705,1860 1782.56,1937.56 1782.56,1966.22 1818.74,2002.4 Q1.E
GND: C1.2 C2.2 C3.2 C4.2 C5.2 C6.2 C7.2 C8.2 C9.2 C10.2 C11.2 C12.2 C13.2 C14.2 C15.2 C18.2 C19.2 C20.2 C21.2 D3.C D4.C DPAD.7 IC1.1 IC2.1 J1.4 J2.P6 J2.S1 J2.S2 J2.S3 J2.S4 PS1.5 R8.1 SCREEN.6 U1.1 U1.15 U1.38 U1.G.1 U1.G.2 U1.G.4 U1.G.5 U1.G.6 U1.G.7 U1.G.8 U1.G.9 U1.G.10 U1.G.11 U1.G.12 U1.G.13 U1.G.14 U1.G.15 U1.G.16 U1.G.17 U1.G.18 U1.G.19 U1.G.20 U1.G.21 U1.G.22 U2.11 U2.12 U2.15 U3.4 U4.4 U5.4 U6.1 U7.1 U8.4 U9.2 U9.25 | length 361.9
  Top Layer w6: U9.2 1750.47,1550.47 U9.25
  Top Layer w20: J1.4 1790,1350.9 1790,1407.47 1811.07,1428.54 1852.07,1428.54 1861.43,1419.19 1874.19,1419.19 1892.5,1437.5 1892.5,1444.51 1908.43,1460.43 C15.2
  other v1: 2485,1500 2605,1520 1800,1560 2130,1560 1760,1600 2880,1730 2110,1825 1995,2040 2105,2385 1790,2410 1690,2765 3005,3130 3360,3270 2965,3460 1970,3485 2820,3500 1635,3570 1970,3655 2130,3900 1225,3920 1470,3935 1290,3970
GPIO0: Q1.C U1.25 | length 1235
  Top Layer w10: Q1.C v1(1740,2005) ; v1(1920,2870) 1939.72,2889.72 1939.72,2891.58 1962.01,2913.87 1962.01,2956.3 U1.25
  Bottom Layer w10: v1(1740,2005) 1740,2048.78 1741.47,2050.25 1741.47,2058.53 1580,2220 1580,2320 1850,2590 1850,2800 v1(1920,2870)
GPIO19: R3.2 U1.31 | length 4799.6
  Top Layer w10: U1.31 1674.72,2895.28 1695.86,2874.14 1704.14,2874.14 1705.22,2875.22 1720.22,2875.22 v1(1725,2880) ; v1(2105,3025) 2107.5,3027.5 2582.5,3027.5 v1(2585,3030) ; v1(2805,3030) 2807.5,3027.5 3487.5,3027.5 v1(3490,3025) ; R3.2 5040.2,4769.06 5053.31,4782.17 5080.4,4782.17 5108.24,4810 v1(5155,4810)
  Bottom Layer w10: v1(1725,2880) 1870,3025 v1(2105,3025) ; v1(2585,3030) v1(2805,3030) ; v1(3490,3025) 3490,3080.29 3535,3125.29 3535,3515 4585,4565 4960,4565 5155,4760 v1(5155,4810)
Left: DPAD.4 U1.29 | length 275.2
  Top Layer w10: DPAD.4 1774.72,3110.28 U1.29
M0CS: IC1.6 U1.10 | length 4362.1
  Top Layer w10: v1(1775,2100) U1.10@1775,2299.45 ; v1(3295,4025) 3295,4215 3340,4260 3988.75,4260 4030,4301.25 4030,4386.75 4015.25,4401.5 3924.75,4401.5 3914.14,4390.89
  Top Layer w15: IC1.6 3895,4371 3914.14,4390.14 3914.14,4390.89
  Bottom Layer w10: v1(1775,2100) 2424.85,2100 3295,2970.15 v1(3295,4025)
M1CS: IC2.6 U1.11 | length 3223.8
  Top Layer w10: U1.11 1825,2299.45 v1(1825,2180) ; v1(3195,4025) IC2.6
  Bottom Layer w10: v1(1825,2180) 1911.72,2180 1926.72,2165 2433.28,2165 3195,2926.72 v1(3195,4025)
MDO: IC1.7 IC2.7 U1.9 | length 4238
  Top Layer w10: U1.9 1724.72,2190.28 1725,2190 v1(1725,2135) ; v1(3245,4025) IC2.7 ; 3264.5,4385.5 3264.5,4386.25 3274.75,4396.5 3445.52,4396.5 3555.52,4286.5 3915.25,4286.5 3925.86,4297.11 3925.86,4297.86 IC1.7@3945,4317
  Top Layer w15: IC2.7 3245,4366 3264.5,4385.5 ; IC1.7@3945,4317 IC1.7
  Bottom Layer w10: v1(1725,2135) 2431.57,2135 3245,2948.43 v1(3245,4025)
MSCK: IC1.5 IC2.5 U1.8 | length 4085.9
  Top Layer w10: v1(1670,2220) 1674.72,2224.72 U1.8 ; v1(3145,4025) IC2.5 ; 3164.5,4386.25 3199.75,4421.5 3455.88,4421.5 3533.38,4344 IC1.5
  Top Layer w15: IC2.5 3145,4366 3164.5,4385.5 3164.5,4386.25
  Bottom Layer w10: v1(1670,2220) 1900,2220 1935,2185 2425,2185 3145,2905 v1(3145,4025)
NetC16_1: C16.1 P3.1 U4.3 | length 247.9
  Top Layer w20: U4.3 2445,4585.5 2478.98,4619.48 C16.1 2478.98,4671.18 2465,4685.16 P3.1
NetC17_1: C17.1 P4.1 U5.3 | length 246.9
  Top Layer w20: U5.3 1740,4629.84 1778.98,4668.82 C17.1 1771.99,4676.99 1771.99,4778.01 P4.1
NetC19_1: C19.1 U2.9 | length 111.8
  Top Layer w10: C19.1 2051.18,3873.98 2096.61,3828.54 2114.43,3828.54 2117.5,3825.47 U2.9
NetC20_1: C20.1 U2.10 | length 257.9
  Top Layer w10: C20.1 1976.18,3875 2097.2,3753.98 2130.6,3753.98 2140.57,3763.95 2140.57,3799.33 U2.10
NetD1_A: D1.A R1.1 | length 124.1
  Top Layer w10: R1.1 4427.91,4773.11 4427.91,4797.91 D1.A
NetD2_A: D2.A R2.1 | length 123.7
  Top Layer w10: R2.1 4700.17,4770.37 4700.17,4796.12 D2.A
NetD3_A: D3.A R3.1 | length 124
  Top Layer w10: R3.1 4978.11,4773.11 4978.11,4795.75 5035,4852.64 D3.A
NetD4_A: D4.A R4.1 | length 123.7
  Top Layer w10: R4.1 5252.91,4773.11 5252.91,4798.86 D4.A
NetIC1_2: IC1.2 P1.2 | length 211.4
  Top Layer w20: IC1.2 3945,4744.43 3975,4774.43 P1.2
NetIC1_3: IC1.3 P1.1 | length 211.4
  Top Layer w20: P1.1 3865,4715.5 3895,4685.5 IC1.3
NetIC2_2: IC2.2 P2.2 | length 212.3
  Top Layer w20: IC2.2 3245,4754.43 3265,4774.43 P2.2
NetIC2_3: IC2.3 P2.1 | length 216.4
  Top Layer w20: P2.1 3165,4701.74 3195,4671.74 IC2.3
NetJ1_1: J1.1 U9.8 | length 293
  Top Layer w6: J1.1 1880.16,1385.43 1937.17,1442.45 1937.17,1512.98 1899.68,1550.47 U9.8
NetJ1_2: J1.2 U9.4 | length 140.2
  Top Layer w6: J1.2 1740.71,1390.36 1740.71,1422.54 1789.84,1471.68 U9.4
NetJ1_3: J1.3 U9.3 | length 244.8
  Top Layer w6: J1.3 1694.68,1347.8 1694.68,1402.46 1769.71,1477.5 1769.71,1502.78 U9.3
NetP5_1: P5.1 PS1.3 RV1.2 | length 1106.1
  Top Layer w40: P5.1 5305,1355.87 5352.64,1403.51 RV1.2 5735.04,1790 5962.93,1790 5990.73,1817.8 PS1.3
NetP5_2: P5.2 PS1.1 | length 1166.8
  Bottom Layer w40: PS1.1 4805,1444.53 4805,1398.43 4828.43,1375 5125,1375 5205,1295 P5.2
NetP5_3: P5.3 PS1.2 RV1.1 | length 782.9
  Top Layer w40: RV1.1 5057.36,1478.31 5090.34,1445.34 ; P5.3 5105,1430.67 5090.34,1445.34 ; PS1.2 5219.13,1574.13 5090.34,1445.34
NetQ1_B: Q1.B R5.1 | length 66.1
  Top Layer w10: Q1.B 1835,1919.21 R5.1
NetQ2_B: Q2.B R6.1 | length 66.1
  Top Layer w10: Q2.B 1655,1919.21 R6.1
NetR7_1: R7.1 U7.2 U7.4 | length 449.5
  Top Layer w20: U7.2 U7.4 1392.6,4046.42 R7.1
NetR7_2: R7.2 R8.2 U3.3 | length 189.3
  Top Layer w20: R7.2 R8.2 1610.92,3906.42 1629.5,3925 U3.3
NetR9_1: R9.1 R10.2 U4.2 | length 378.5
  Top Layer w20: U4.2 2495,4528.5 2525.5,4498 2563.78,4498 2607.87,4542.09 R9.1 2659.92,4542.09 2692.72,4509.29 2692.72,4452.8 2659.92,4420 R10.2
NetR9_2: R9.2 U2.5 U4.6 | length 973.9
  Top Layer w10: U2.5 2194.43,4010.67 2194.43,4094.43 2281.92,4181.92 2438.49,4181.92 2608.5,4351.93 2608.5,4438.5
  Top Layer w20: U4.6 2445,4391.5 2492,4438.5 2608.5,4438.5 2647.28,4477.28 2647.28,4482.2 2650.08,4485 R9.2
NetR11_1: R11.1 R12.2 U5.2 | length 381.7
  Top Layer w20: U5.2 1790,4531.5 1820.5,4501 1858.78,4501 1880.53,4522.75 1880.53,4523.25 1902.28,4545 R11.1 1954.92,4545 1987.72,4512.2 1987.72,4452.8 1954.92,4420 R12.2
NetR11_2: R11.2 U2.6 U5.6 | length 820.5
  Top Layer w10: 1897.22,4440.06 1897.22,4363.96 2167.5,4093.69 U2.6
  Top Layer w20: U5.6 1740,4394.5 1785.56,4440.06 1897.22,4440.06 1945.08,4487.91 R11.2
RESET: C18.1 Q2.C U1.3 | length 407.1
  Top Layer w10: U1.3 1424.72,2278.07 1410.51,2263.86 C18.1 1410.51,2108.82 1537.44,1981.89 1537.44,1979.69 1552.13,1965 Q2.C
Right: DPAD.6 U1.30 | length 295.9
  Top Layer w10: DPAD.6 1724.72,3060.28 U1.30
RTS: Q2.E R5.2 U9.19 | length 743.2
  Top Layer w6: U9.19 1703.23,1672.99 1833.82,1803.58 R5.2
  Top Layer w10: Q2.E 1694.21,2050 1865,2050 1885,2030 1885,1853.58 R5.2
RXD0: U1.34 U9.21 | length 1637.2
  Top Layer w6: U9.21 1702.45,1590.62 1678.17,1590.62 1657.5,1611.29 1657.5,1673.07 1745,1760.57 v1(1745,1800)
  Top Layer w10: v1@1515,2880 1520,2875 v1(1525,2875) 1525,2968.74 U1.34
  Bottom Layer w10: v1(1525,2875) 1489.04,2875 1447.5,2833.46 1447.5,2097.5 v1(1745,1800)
RXT: D2.C U9.13 | length 4545.4
  Top Layer w6: U9.13 1829.21,1667.6 1866.61,1705 v1(1920,1705)
  Top Layer w10: v1(4600,4805) 4650,4855 D2.C
  Bottom Layer w10: v1(1920,1705) 2086.42,1705 3506.57,3125.15 3506.57,3536.57 4600,4630 v1(4600,4805)
SCL: U1.36 U8.1 | length 2136.5
  Top Layer w10: U1.36 1425,2969.29 v1(1425,3085) ; v1(2025,4740) 2029.78,4735.22 2039.78,4735.22 2040,4735 2045.75,4740.75 U8.1
  Bottom Layer w10: v1(1425,3085) 1430,3090 1430,4134.04 1997.5,4701.54 1997.5,4712.5 v1(2025,4740)
SDA: U1.37 U8.2 | length 2171.6
  Top Layer w10: v1(1370,3085) 1370,2973.74 U1.37 ; v1(1965,4715) 1965,4713.36 1970.86,4707.5 2039.17,4707.5 2040.92,4709.25 U8.2
  Bottom Layer w10: v1(1370,3085) 1370,4120 v1(1965,4715)
SDCLK: J2.P5 U1.20 | length 1968.4
  Top Layer w15: U1.20 2024.31,2649.15 2075.14,2649.15 2410,2314.29 2410,1245.65 2447.12,1208.52 2537.45,1208.52 2653.31,1324.39 J2.P5
SDCMD: J2.P3 U1.19 | length 2041.2
  Top Layer w15: U1.19 2018.46,2605 2080,2605 2375,2310 2375,1245.29 2436.77,1183.52 2579.45,1183.52 2731.67,1335.74 2731.67,1370.33 J2.P3
SDDATA0: J2.P7 U1.21 | length 1911.8
  Top Layer w15: U1.21 2024.31,2699.15 2060.49,2699.15 2447.22,2312.42 2447.22,1243.78 2457.48,1233.52 2527.09,1233.52 2566.69,1273.12 J2.P7
SDDATA1: J2.P8 U1.22 | length 1610.4
  Top Layer w15: U1.22 2035.75,2759.37 2050.53,2744.59 2060.71,2744.59 2070.96,2734.34 2070.96,2724.04 2486.59,2308.41 2486.59,1569.37 2523.39,1532.57 J2.P8
SDDATA2: J2.P1 U1.17 | length 2118.5
  Top Layer w15: U1.17 2104.92,2509.37 2295,2319.29 2295,1254.58 2416.05,1133.52 2600.24,1133.52 2799.98,1333.26 2799.98,1338.25 2826.54,1364.8 J2.P1
SDDATA3: J2.P2 U1.18 | length 2095.6
  Top Layer w15: U1.18 2090.27,2559.37 2335,2314.64 2335,1249.93 2426.41,1158.52 2589.89,1158.52 2774.98,1343.62 2774.98,1386.08 J2.P2
SPIHD: U1.23
SPIMISO: SCREEN.1 U1.14 U2.1 | length 2012.9
  Top Layer w10: v1(2269.57,3891.19) 2269.57,3894.57 2292.5,3917.5 U2.1 ; v1(2270,2995) 2270,2660 SCREEN.1
  Top Layer w15: U1.14 2104.31,2299.72 2119.59,2315 v1(2125,2315)
  Bottom Layer w10: v1(2125,2315) 2129.78,2319.78 2139.78,2319.78 SCREEN.1 ; v1(2269.57,3891.19) 2269.57,2995.43 v1(2270,2995)
SPIMOSI: SCREEN.4 U1.16 U2.3 | length 2277.3
  Top Layer w10: v1(2190,3940) 2195,3945 2214.15,3945 2240.57,3971.43 2240.57,4006.81 U2.3
  Top Layer w15: v1(1905,2465) 1907.82,2462.18 2011.28,2462.18 U1.16
  Bottom Layer w10: v1(1905,2465) 1904.14,2465.86 1904.14,2484.14 2019.53,2599.53 2419.53,2599.53 SCREEN.4 2190,2940 v1(2190,3940)
SPISCK: SCREEN.3 U1.13 U2.2 | length 2343.2
  Top Layer w10: v1(2235,3920) 2240,3920 2267.5,3947.5 U2.2
  Top Layer w15: U1.13 1934.94,2289.51 1934.94,2257.67 1949.76,2242.85 2157.85,2242.85 v1(2200,2285)
  Bottom Layer w10: v1(2200,2285) 2202.5,2285 2481.89,2564.39 2484.39,2564.39 2484.39,2584.39 2527.68,2627.68 2527.68,2661.15 2527.68,2682.32 2512.7,2697.3 2225,2985 2225,3910 v1(2235,3920)
TXD0: U1.35 U9.20 | length 1574
  Top Layer w6: U9.20 1702.45,1610.31 1681.11,1610.31 1673.5,1617.92 1673.5,1666.44 1784.86,1777.8 v1@1784.86,1829.38
  Top Layer w10: U1.35 1480,2963.74 v1(1480,2820) ; v1(1784.86,1834.17) v1@1789.64,1829.38
  Bottom Layer w10: v1(1480,2820) 1480,2116.69 1620.95,1975.74 1643.29,1975.74 v1(1784.86,1834.17)
TXT: D1.C U9.14 | length 4441.7
  Top Layer w6: U9.14 1810.31,1657.55 1810.31,1678.89 1886.42,1755 1915,1755 v1(1920,1760)
  Top Layer w10: v1(4340,4805) 4340,4811.18 4359.89,4831.07 4359.89,4839.89 4375,4855 D1.C
  Bottom Layer w10: v1(1920,1760) 2240,2080 2433.14,2080 3480,3126.86 3480,3555 4340,4415 v1(4340,4805)
Up: DPAD.5 U1.27 | length 553.5
  Top Layer w10: DPAD.5 1587.5,3297.5 1624.53,3297.5 1662.5,3259.53 1788.44,3259.53 1874.72,3173.25 U1.27
VGND: C16.2 C17.2 P3.2 P4.2 R10.1 R12.1 U2.7 U3.2 U3.6 | length 3134.3
  Top Layer w10: U3.6 1905.71,3925 1940.71,3960 1940.71,3960.35 2036.38,4056.02 2130.6,4056.02 2140.57,4046.05 2140.57,4010.67 U2.7
  Top Layer w20: U3.2 v1(1745,3975) 1773.5,3975 1823.5,3925 U3.6 ; P4.2 1865,4774.43 1840,4749.43 C17.2 1883.8,4670 2017.72,4536.08 2017.72,4425.71 R12.1@1957.72,4365.71 ; R12.1 1954.92,4362.91 1999.97,4317.87 2017.13,4317.87 v1(2020,4315) ; P3.2 2565,4696.18 2540,4671.18 2544.64,4666.54 2589.34,4666.54 2722.72,4533.16 2722.72,4425.71 2659.92,4362.91 R10.1 2652.5,4360.41 2652.5,4322.5 v1(2650,4320)
  Bottom Layer w15: v1(1745,3975) 1680,4040 1680,4215 1780,4315 v1(2020,4315) 2022.5,4317.5 2647.5,4317.5 v1(2650,4320)
pads on no net: DPAD.8 IC1.8 IC2.8 J1. J2.CD PS1.4 PS1.6 PS1.7 PS1.8 U1.4 U1.5 U1.6 U1.7 U1.32 U1.33 U2.8 U3.1 U3.5 U3.8 U4.1 U4.5 U4.8 U5.1 U5.5 U5.8 U9.1 U9.9 U9.10 U9.11 U9.12 U9.15 U9.16 U9.17 U9.18 U9.22 U9.24

## Polygon pours and split planes (outlines as drawn)
GND on Top Layer "NONET_L02_P-001" (solid, pour order 0): 6505,1002.16 6505,4997.16 6500,4992.16 1000,4992.16 1000,1007.16 1005,1002.16 1000,1007.16 1005,1002.16
GND on Bottom Layer "GND_POUR" (solid, pour order 1): 995,1005 6500,1005 6500,5000 1000,5000 1000,1000

## Other copper
Top Layer:
  pour cut-out: 3860,897.74 3860,2515 6805,2515 6805,745
Bottom Layer:
  pour cut-out: 3860,895.34 3860,2510 6790,2510 6790,740

## Text inside footprints (layer, text, board x,y; h text height)
DPAD: Top Overlay "2" at 1880,3225 h50 r180; Top Overlay "1" at 1860,3325 h50 r180; Top Overlay "7" at 1420,3325 h50 r180; Top Overlay "8" at 1420,3225 h50 r180
SCREEN: Top Overlay "1" at 2295,2535 h50; Top Overlay "2" at 2275,2635 h50; Top Overlay "5" at 2635,2535 h50; Top Overlay "6" at 2635,2635 h50
U3: Top Overlay "*" at 1625,4041 h50; Mechanical 13 "*" at 1669,3996 h50
U4: Top Overlay "*" at 2561,4590 h50 r270; Mechanical 13 "*" at 2516,4546 h50 r270
U5: Top Overlay "*" at 1856,4593 h50 r270; Mechanical 13 "*" at 1811,4549 h50 r270